# Allegro board full_add.brd
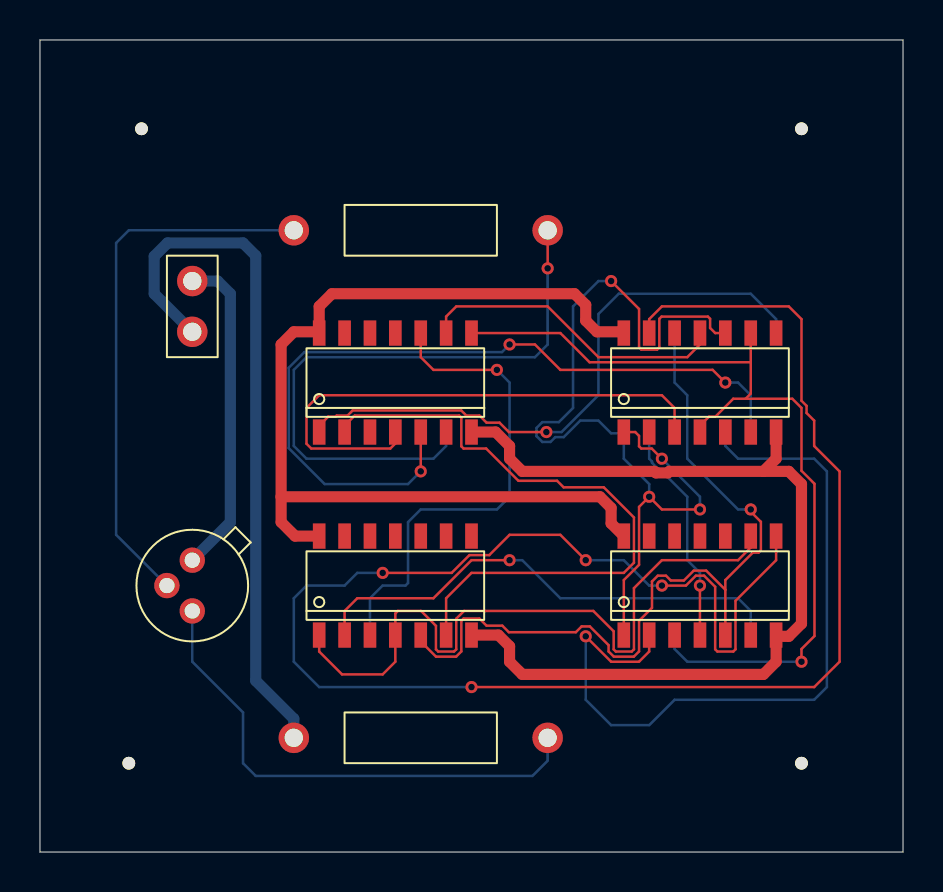
[diagram p0: board, top side]
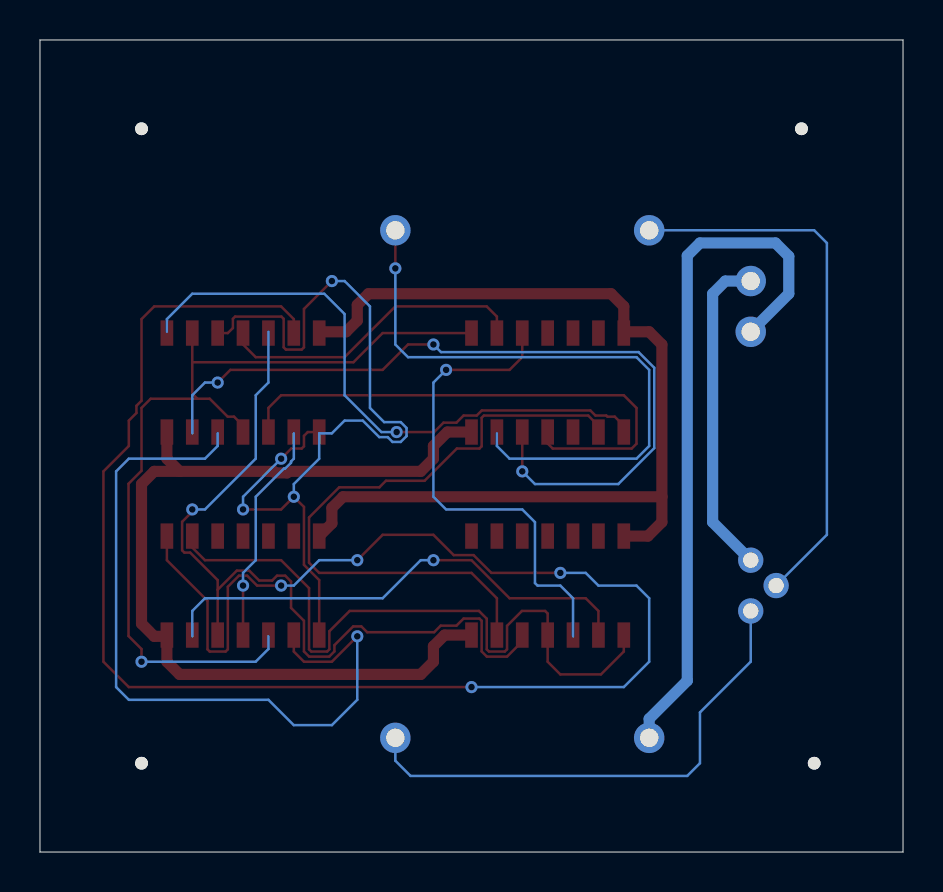
[diagram p1: board, bottom side, seen from below]

Outline 43.18 x 40.64 mm; copper layers: TOP, BOTTOM. Coordinates in mm from the lower left corner of the outline.
Outline path: 0,40.64 0,0 43.18,0 43.18,40.64 0,40.64

## Placement (name value [footprint] x y rotation side)
J1  CON2  [JUMPER2]  7.62 26.04 90 top
NOREF  -  [unnamed]  4.44 4.45 0 top
NOREF#2  -  [unnamed]  38.1 4.45 0 top
NOREF#3  -  [unnamed]  38.1 36.2 0 top
NOREF#4  -  [unnamed]  5.08 36.2 0 top
Q1  Q2N2222  [TO18]  7.62 14.61 180 top
R1  1k  [RES500]  12.7 5.72 90 top
R2  1k  [RES500]  12.7 31.12 90 top
U1  7432  [SOIC14]  17.78 23.5 90 top
U2  7408  [SOIC14]  33.02 23.5 90 top
U3  7404  [SOIC14]  33.02 13.34 90 top
U4  7408  [SOIC14]  17.78 13.34 90 top

## Library data of the parts
J1 = CON2: User Part Number: ***
Q1 = Q2N2222
R1 R2 = R: Tolerance: ***; User Part Number: ***
U1 = 7432: Tolerance: ***; User Part Number: ***
U2 U4 = 7408: Tolerance: ***; User Part Number: ***
U3 = 7404: Tolerance: ***; User Part Number: ***

## Footprints (pads in the part's own frame, mm; a bottom-side part is the same pattern mirrored in y, then rotated)
JUMPER2
  round 1.524 hole 0.914: 1(0,0) 2(2.54,0)
RES500
  round 1.524 hole 0.914: 1(0,-12.7) 2(0,0)
SOIC14
  rect 1.27x0.635 smd: 1(-2.477,3.81) 2(-2.477,2.54) 3(-2.477,1.27) 4(-2.477,0) 5(-2.477,-1.27) 6(-2.477,-2.54) 7(-2.477,-3.81) 8(2.477,-3.81) 9(2.477,-2.54) 10(2.477,-1.27) 11(2.477,0) 12(2.477,1.27) 13(2.477,2.54) 14(2.477,3.81)
TO18
  round 1.27 hole 0.762: 1(0,0) 2(1.27,1.27) 3(0,2.54)
unnamed
  round 0.635 hole 3.175 unplated: (0,0)

## Nets
GND: U1.7 U2.7 U3.7 U4.7
VCC: U1.14 U2.14 U3.14 U4.14
0: J1.2 Q1.1(E)
CARRY_OUT: U1.3(Y)
N02209_HALFADD_A0: U1.9(A) U2.11(Y)
N02209_HALFADD_A1: U1.4(A) U2.3(Y)
N02216_HALFADD_A0: U1.10(B) U4.3(Y)
N02216_HALFADD_A1: U1.5(B) U2.6(Y)
N02338_HALFADD_A0: U2.13(B) U3.8(Y)
N02338_HALFADD_A1: U2.2(B) U3.4(Y)
N02351_HALFADD_A0: U3.6(Y) U4.2(B)
N02351_HALFADD_A1: U2.5(B) U3.2(Y)
N00210: U1.8(Y) U2.4(A) U2.9(A) U3.3(A)
N00235: U1.2(B) U4.6(Y)
N00364: U2.12(A) U3.5(A) U4.5(B)
N00368: U3.9(A) U4.1(A) U4.4(A)
N00380: U2.1(A) U2.10(B) U3.1(A)
N00424: U1.1(A) U2.8(Y)
N00524: R2.1 U1.6(Y)
N00528: Q1.2(B) R2.2
N00532: Q1.3(C) R1.1
N00579: J1.1 R1.2

Pads without a net: U1 11 12 13; U3 10 11 12 13; U4 8 9 10 11 12 13

## Via types
v1: diameter 0.61, hole 0.33, TOP to BOTTOM, 19 vias

## Routing (per net, layer and track width the routed paths; a pad name or vN(x,y) marks a point on that pad's centre or on a via; arc(x,y) is an arc through that point)
GND: length 46.9
  TOP w0.559: 36.19,19.05 37.47,19.05 38.1,18.42 38.1,11.43 37.47,10.8 36.89,10.8 U3.7 36.83,9.53 36.19,8.89 24.13,8.89 23.5,9.53 23.5,10.3 22.94,10.86 U4.7 ; 36.19,19.05 36.83,19.69 U2.7 ; 36.19,19.05 31.49,19.05 31.41,18.97 30.82,18.97 30.74,19.05 24.13,19.05 23.5,19.69 23.5,20.32 22.8,21.02 U1.7
VCC: length 49.8
  TOP w0.559: U3.14 28.57,16.45 28.57,17.22 28.02,17.78 12.06,17.78 ; 12.06,17.78 12.06,25.4 12.7,26.04 13.91,26.04 U1.14 13.97,27.31 14.61,27.94 26.75,27.94 27.31,27.38 27.31,26.59 27.86,26.04 29.15,26.04 U2.14 ; 12.06,17.78 12.06,16.51 12.76,15.81 U4.14
0: length 16.3
  BOTTOM w0.559: J1.2 8.89,28.58 9.53,27.94 9.53,16.51 Q1.1
N02209_HALFADD_A0: length 15.6
  TOP w0.127: U1.9 20.32,26.8 20.83,27.31 25.4,27.31 27.94,24.77 32.38,24.77 33.02,25.4 U2.11
N02209_HALFADD_A1: length 27.2
  TOP w0.127: U1.4 17.78,20.45 17.53,20.19 13.57,20.19 13.33,20.43 13.33,22.23 13.97,22.86 31.12,22.86 31.75,22.23 U2.3
N02216_HALFADD_A0: length 24.7
  TOP w0.127: U1.10 19.05,24.77 19.69,24.13 v1(22.86,24.13)
  BOTTOM w0.127: v1(22.86,24.13) 23.5,23.5 23.5,17.78 22.86,17.15 19.05,17.15 18.42,16.51 18.42,13.46 18.29,13.34 17.14,13.34 16.51,12.7 16.51,10.8
N02216_HALFADD_A1: length 40.2
  TOP w0.127: v1(23.5,25.4) 24.76,25.4 26.04,24.13 33.66,24.13 v1(34.29,23.5) ; v1(19.05,19.05) U1.5
  BOTTOM w0.127: 35.56,20.96 35.56,22.86 34.93,23.5 v1(34.29,23.5) ; v1(19.05,19.05) 18.42,18.42 14.25,18.42 12.45,20.21 12.45,24.24 13.23,25.02 23.11,25.02 v1(23.5,25.4)
N02338_HALFADD_A0: length 92.9
  TOP w0.127: v1(27.31,14.61) 26.04,15.88 23.5,15.88 22.48,14.86 21.48,14.86 20.6,13.97 v1(17.14,13.97) ; U2.13 30.48,26.67 31.12,27.31 37.47,27.31 38.1,26.67 38.1,22.58 38.35,22.33 38.35,21.97 38.74,21.59 38.74,20.32 40,19.05 40,9.53 38.74,8.25 v1(21.59,8.25) ; v1(31.12,13.34) 32.32,13.34 32.81,13.83 33.23,13.83 33.78,13.27 33.78,10.14 33.89,10.03 34.69,10.03 34.8,10.14 34.8,12.57 36.83,14.61 U3.8
  BOTTOM w0.127: v1(27.31,14.61) 29.21,14.61 30.48,13.34 v1(31.12,13.34) ; v1(21.59,8.25) 13.97,8.25 12.7,9.53 12.7,12.7 13.33,13.34 15.24,13.34 15.88,13.97 v1(17.14,13.97)
N02338_HALFADD_A1: length 11.2
  TOP w0.127: U3.4 v1(33.02,13.34)
  BOTTOM w0.127: 30.48,20.96 30.48,19.69 30.62,19.55 30.62,19.48 30.91,19.19 30.98,19.19 32.38,17.78 32.38,14.61 33.02,13.97 v1(33.02,13.34)
N02351_HALFADD_A0: length 24.9
  TOP w0.127: U4.2 15.24,12.06 15.88,12.7 19.69,12.7 21.59,14.61 v1(23.5,14.61)
  BOTTOM w0.127: 35.56,10.8 35.56,12.06 34.93,12.7 26.04,12.7 24.13,14.61 v1(23.5,14.61)
N02351_HALFADD_A1: length 38.3
  TOP w0.127: v1(27.31,10.8) 28.57,9.53 29.97,9.53 30.48,10.03 U3.2
  BOTTOM w0.127: 34.29,20.96 34.29,20.32 34.93,19.69 38.74,19.69 39.37,19.05 39.37,8.25 38.74,7.62 31.75,7.62 30.48,6.35 28.57,6.35 27.31,7.62 v1(27.31,10.8)
N00210: length 44.6
  TOP w0.127: 35.56,24.51 35.56,22.94 35.31,22.68 ; 35.56,24.51 U2.9 ; 35.56,24.51 27.5,24.51 26.04,25.97 U1.8 ; 35.31,22.68 34.69,22.68 33.79,21.79 33.47,21.79 33.02,21.34 U2.4 ; 35.31,22.68 37.64,22.68 38.1,22.23 38.1,19.08 38.75,18.43 38.75,10.81 38.1,10.16 v1(38.1,9.53)
  BOTTOM w0.127: v1(38.1,9.53) 32.38,9.53 31.75,10.16 31.75,10.8
N00235: length 32.2
  TOP w0.127: U4.6 20.32,12.7 21.59,13.97 29.21,13.97 29.72,14.48 29.72,16.74 28.21,18.25 26.2,18.25 25.87,18.58 23.94,18.58 22.32,20.19 21.19,20.19 21.08,20.3 21.08,21.73 20.97,21.84 15.75,21.84 15.24,21.34 U1.2
N00364: length 41.1
  TOP w0.127: U3.5 34.29,13.12 ; 34.29,13.12 33.33,14.08 32.71,14.08 32.21,13.59 31.56,13.59 31.32,13.83 30.91,13.83 30.62,13.54 30.62,12.22 29.97,11.57 29.97,10.04 29.71,9.78 28.71,9.78 28.45,10.04 28.45,10.35 27.51,11.29 27.1,11.29 26.81,11 23.46,11 23.13,11.33 22.34,11.33 21.99,11.68 21.19,11.68 21.08,11.57 21.08,10.04 20.82,9.78 19.81,9.78 19.05,10.54 U4.5 ; 34.29,13.12 34.29,13.61 35.67,14.99 35.96,14.99 36.07,15.1 36.07,16.53 35.56,17.03 v1(35.56,17.15)
  BOTTOM w0.127: v1(35.56,17.15) 34.93,17.15 32.38,19.69 32.38,22.86 31.75,23.5 31.75,26.04
N00368: length 34.8
  TOP w0.127: U3.9 35.56,15.24 34.93,14.61 31.12,14.61 29.72,13.21 29.72,10.14 29.61,10.03 28.81,10.03 28.7,10.14 28.7,11.05 27.69,12.06 21.22,12.06 20.83,11.68 20.83,10.14 20.72,10.03 19.92,10.03 19.81,10.14 19.81,11.32 19.07,12.06 17.91,12.06 17.78,11.94 U4.4 17.78,9.53 17.14,8.89 15.11,8.89 13.97,10.03 U4.1
N00380: length 45.8
  TOP w0.127: U2.1 29.78,21.02 29.97,20.83 29.97,20.3 30.08,20.19 30.61,20.19 v1(31.12,19.69) ; U2.10 33.78,25.97 33.53,26.23 33.53,26.69 33.42,26.8 31.1,26.8 30.99,26.69 30.99,25.26 30.88,25.15 30.08,25.15 29.97,25.26 29.97,27.18 v1(28.57,28.58) ; U3.1 29.21,13.61 29.97,14.37 29.97,17.27 v1(30.48,17.78) 31.12,17.15 v1(33.02,17.15)
  BOTTOM w0.127: v1(28.57,28.58) 27.94,28.58 26.67,27.31 26.67,22.23 25.96,21.51 25.13,21.51 24.84,21.22 24.84,20.81 25.13,20.52 25.54,20.52 25.78,20.76 26.2,20.76 27.03,21.59 27.94,21.59 28.57,20.96 29.21,20.96 29.21,19.69 30.48,18.42 v1(30.48,17.78) ; v1(33.02,17.15) 33.02,17.78 v1(31.12,19.69)
N00424: length 30.3
  TOP w0.127: U1.1 13.97,21.34 14.42,21.79 14.79,21.79 14.84,21.84 15.39,21.84 15.64,22.1 21.08,22.1 21.33,21.84 21.99,21.84 22.34,21.49 22.99,21.49 23.46,21.02 v1(25.34,21.02)
  BOTTOM w0.127: v1(25.34,21.02) 26.1,21.02 27.94,22.86 27.94,26.92 28.96,27.94 35.56,27.94 36.83,26.67 36.83,26.04
N00524: length 31.5
  TOP w0.127: R2.1 v1(25.4,29.21)
  BOTTOM w0.127: v1(25.4,29.21) 25.4,25.4 24.76,24.77 13.33,24.77 12.7,24.13 12.7,20.32 13.33,19.69 19.69,19.69 20.32,20.32 20.32,20.96
N00528: length 27.4
  BOTTOM w0.127: R2.2 4.44,31.12 3.81,30.48 3.81,15.88 Q1.2
N00532: length 25.6
  BOTTOM w0.127: R1.1 25.4,4.57 24.64,3.81 10.8,3.81 10.16,4.45 10.16,6.99 7.62,9.53 Q1.3
N00579: length 35.1
  BOTTOM w0.559: R1.2 12.7,6.67 10.8,8.57 10.8,29.85 10.16,30.48 6.38,30.48 5.72,29.82 5.72,27.94 J1.1
